# Altium PCB UC-428.pcbdoc
Units mil, origin at the board's own origin, x right, y up, seen from the top; angles counter-clockwise.
Board outline 1574.8 x 1574.8 mil, 4 copper layers (Top Layer, Signal Layer 1, InternalPlane1, Bottom Layer), stack 33.234 mil thick; 63 components, 81 nets, 376 pads, 174 vias.
Unrouted connection lines stored in the file: 52.
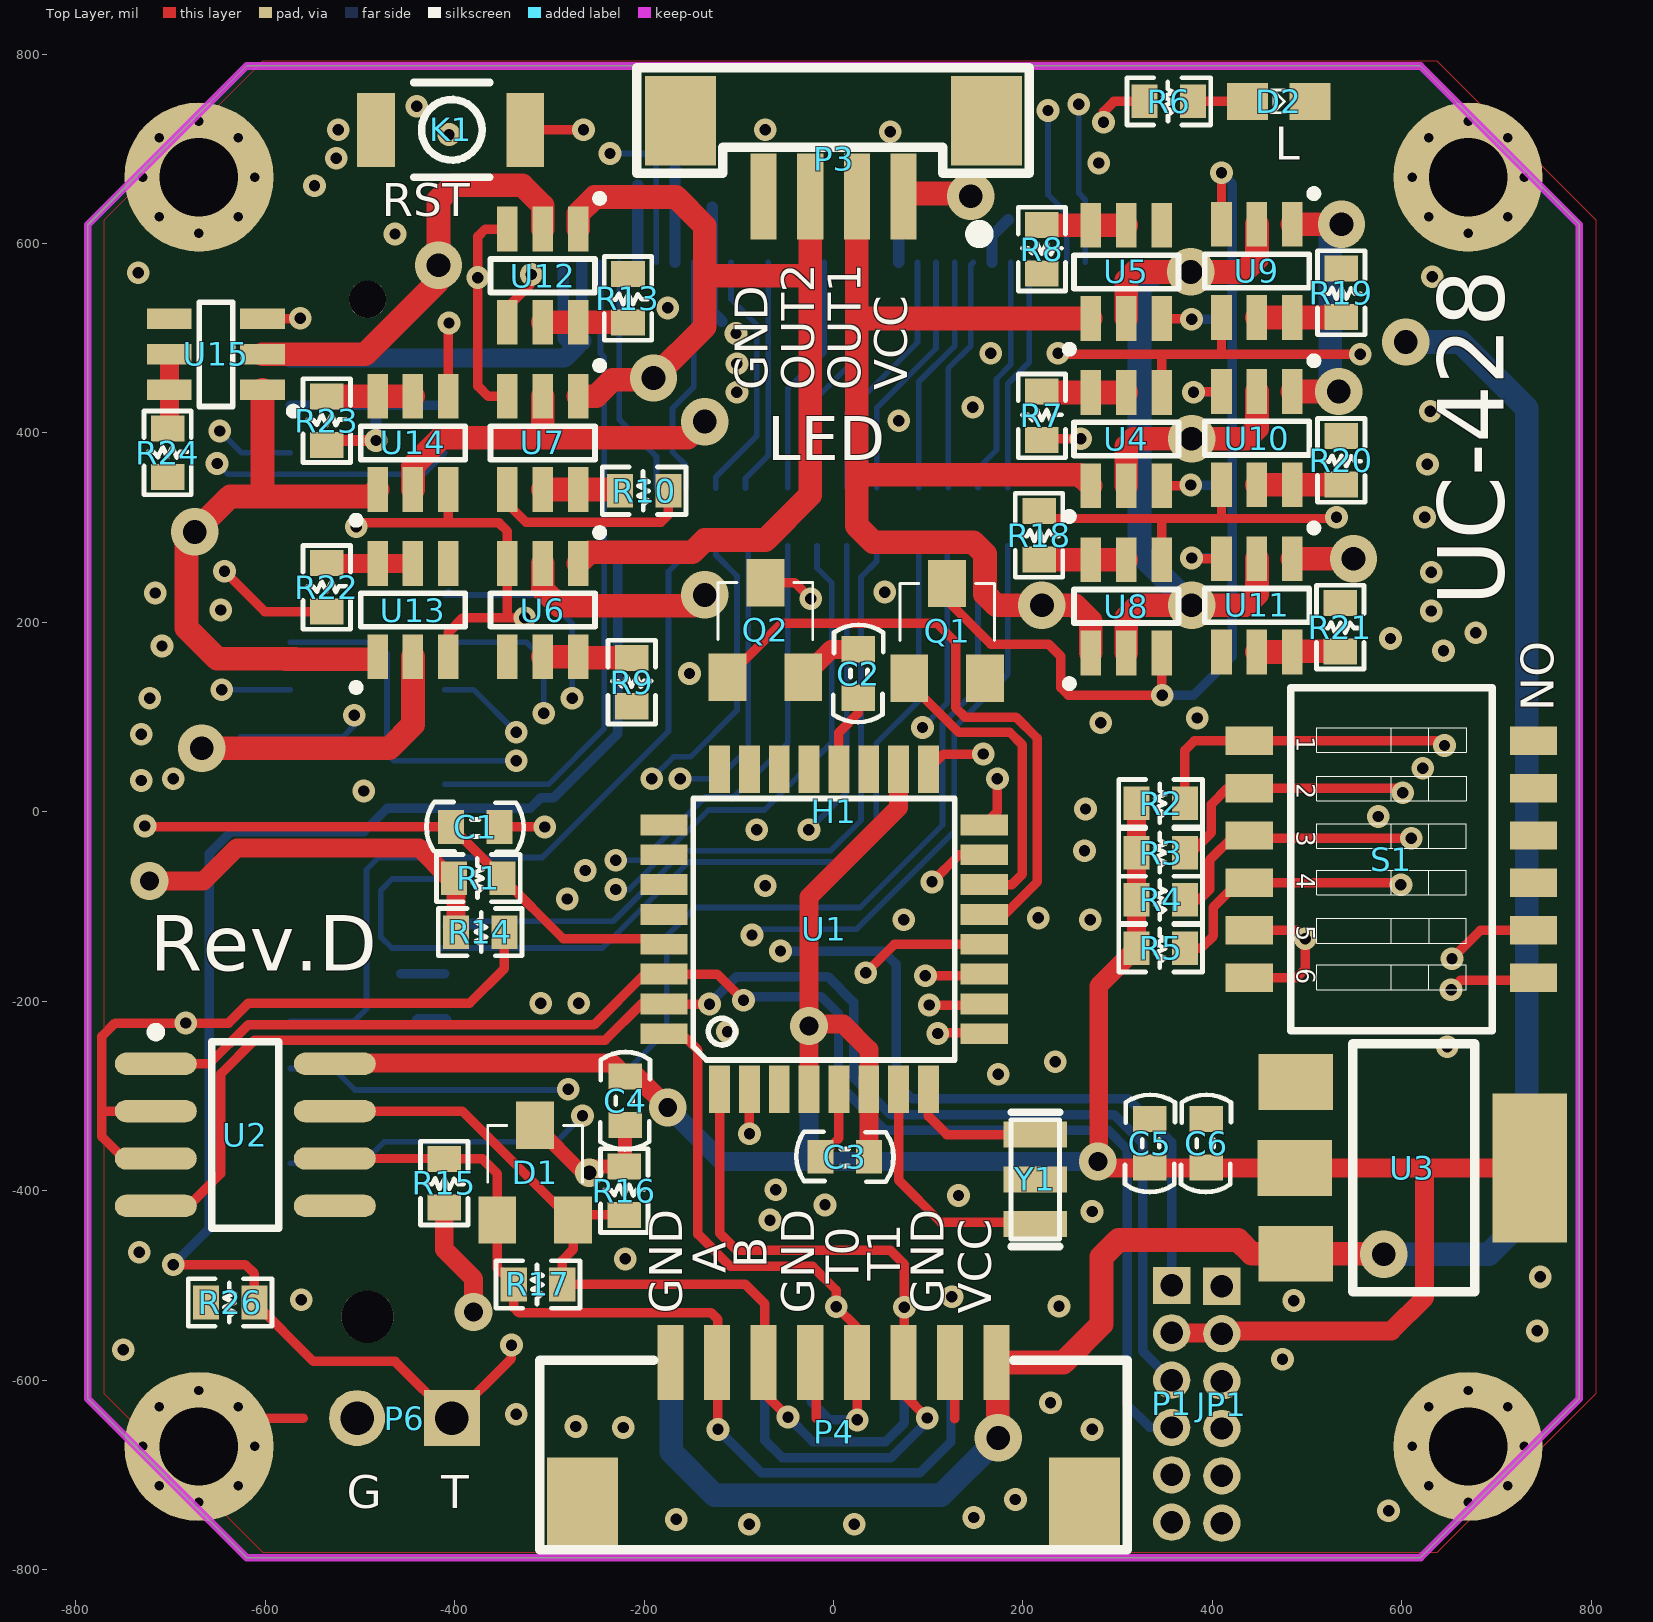
[diagram p0: Top Layer view]
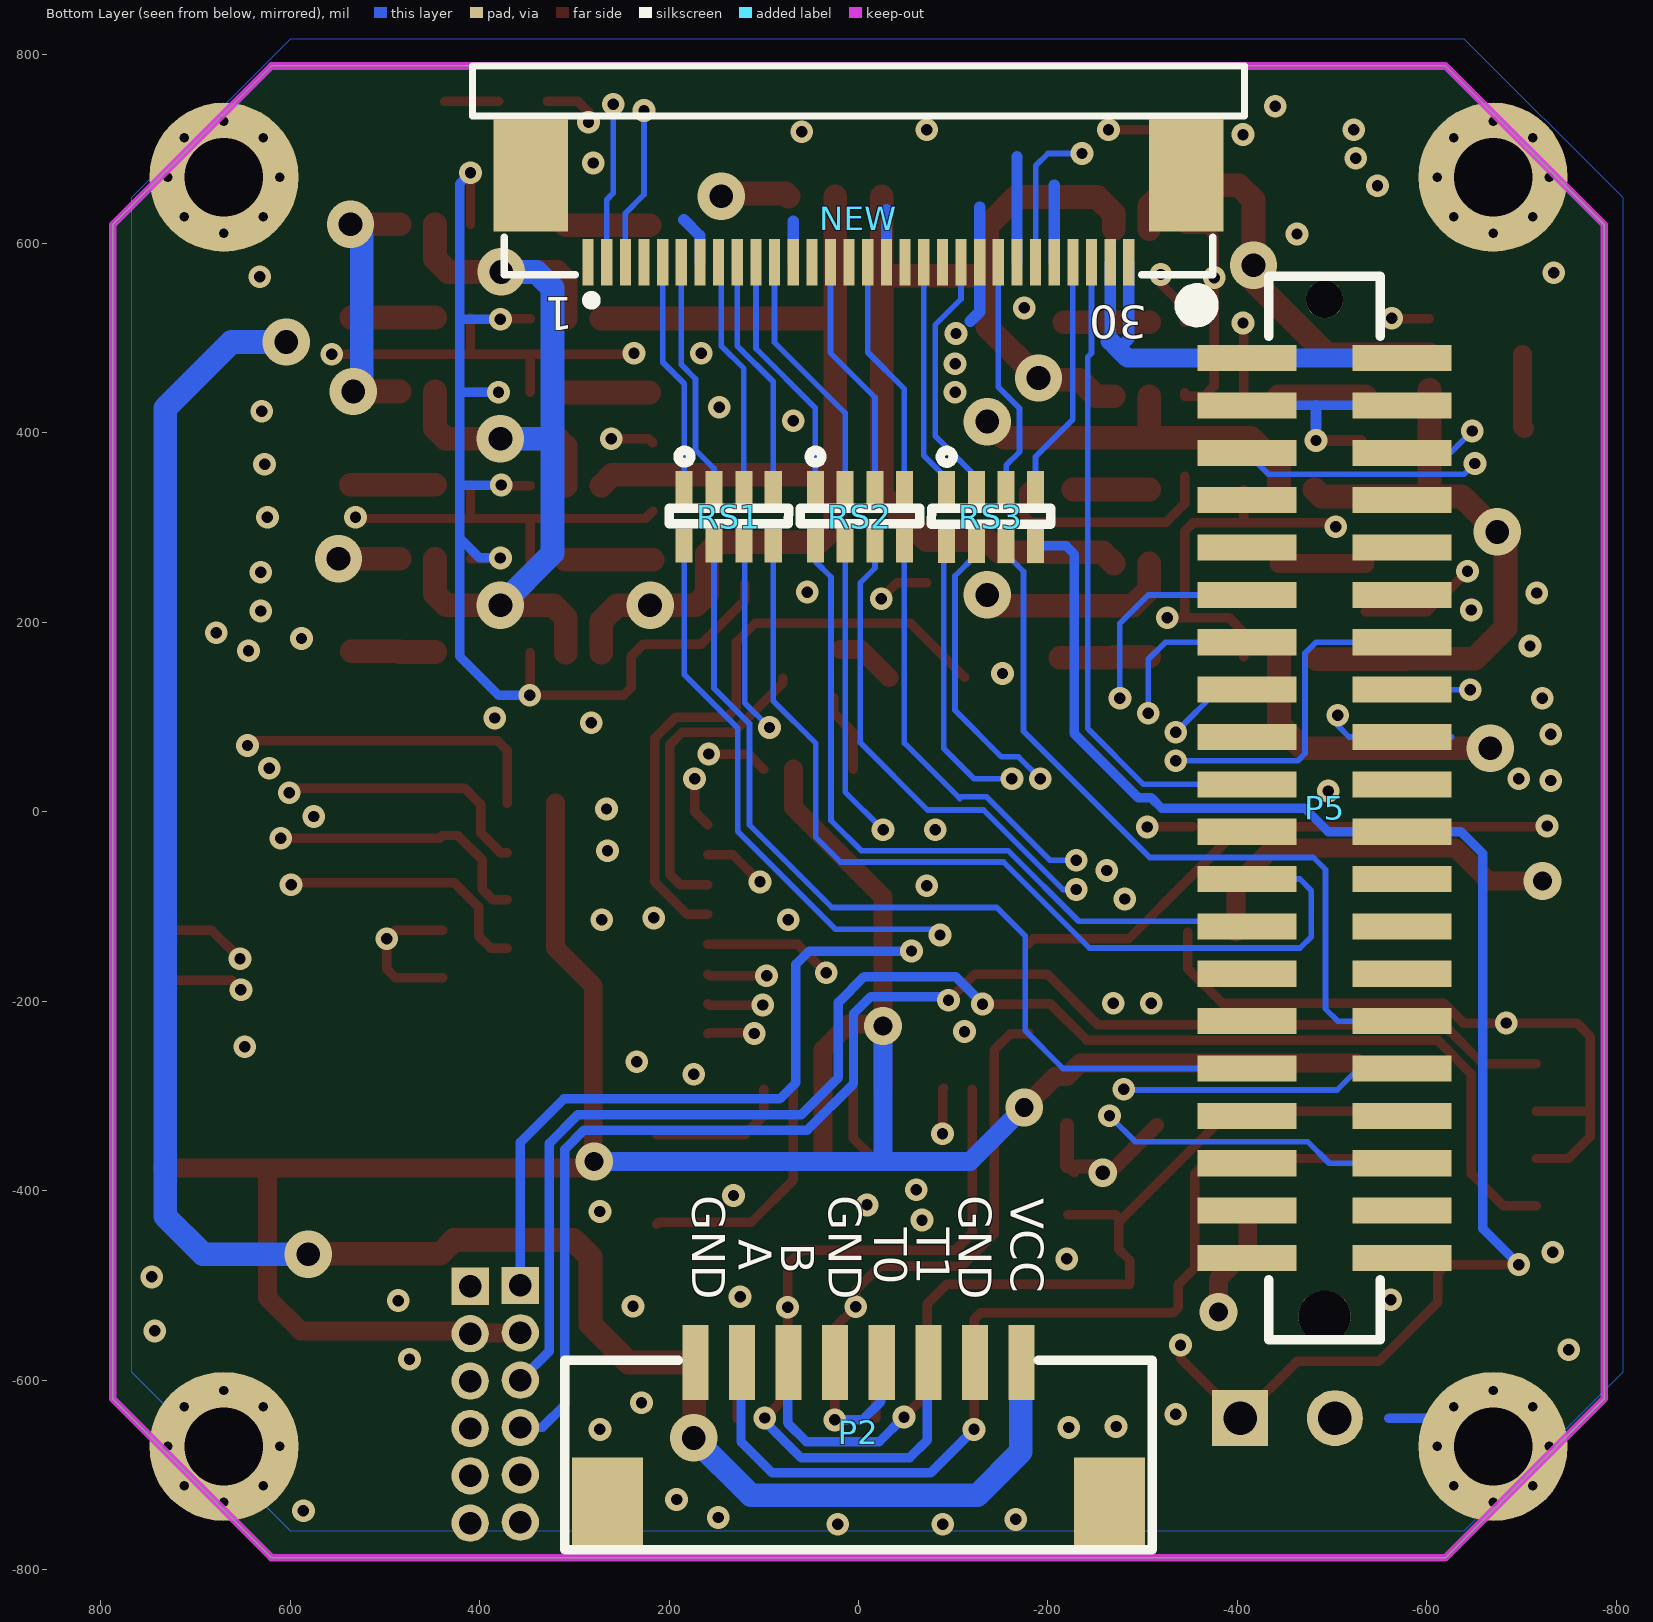
[diagram p1: Bottom Layer view, seen from below]
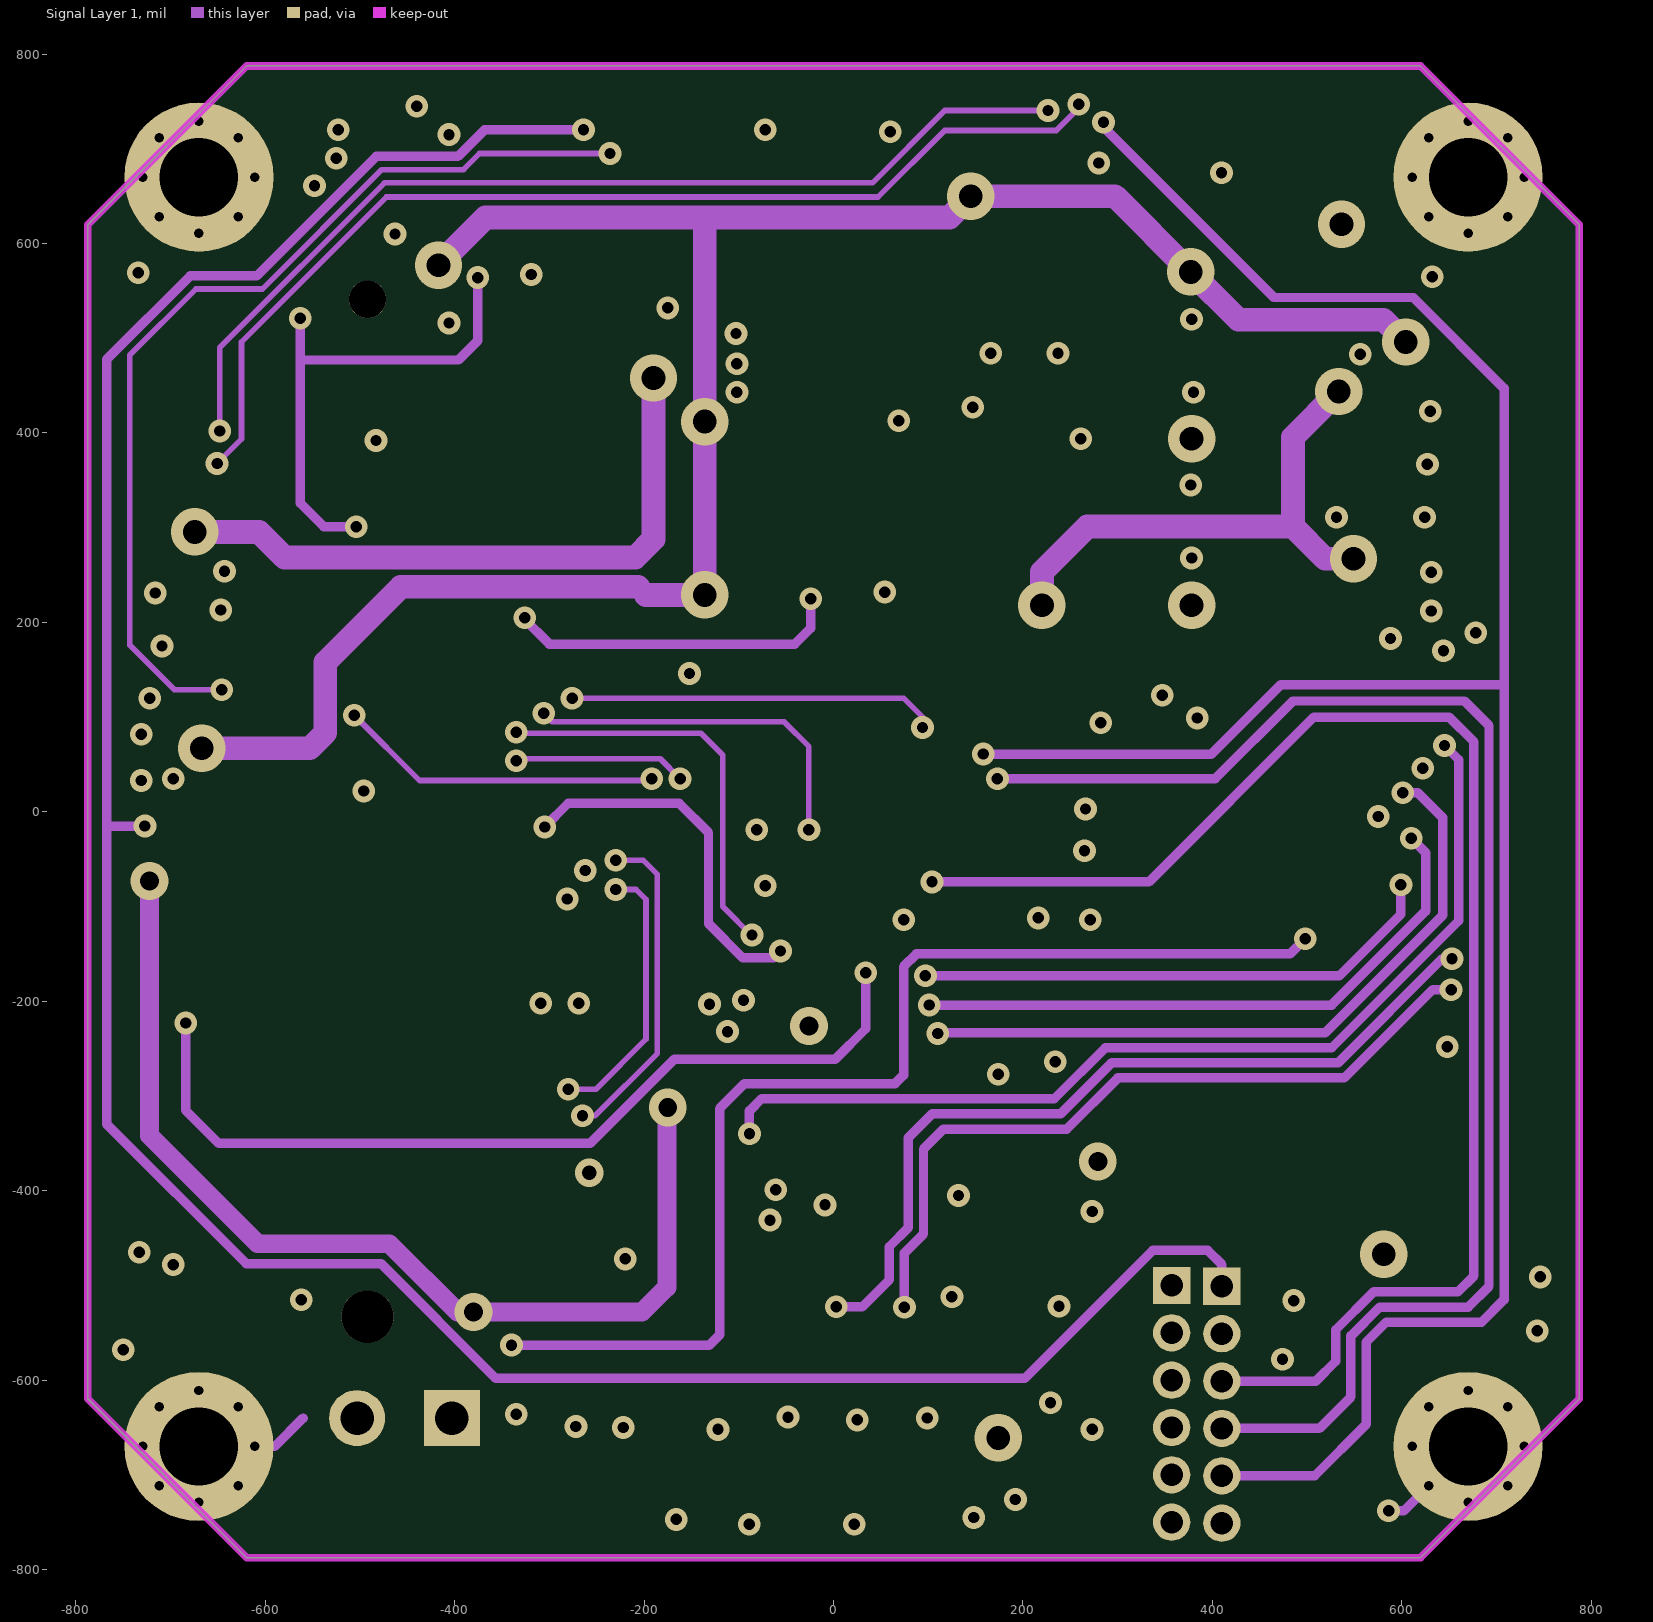
[diagram p2: Signal Layer 1]
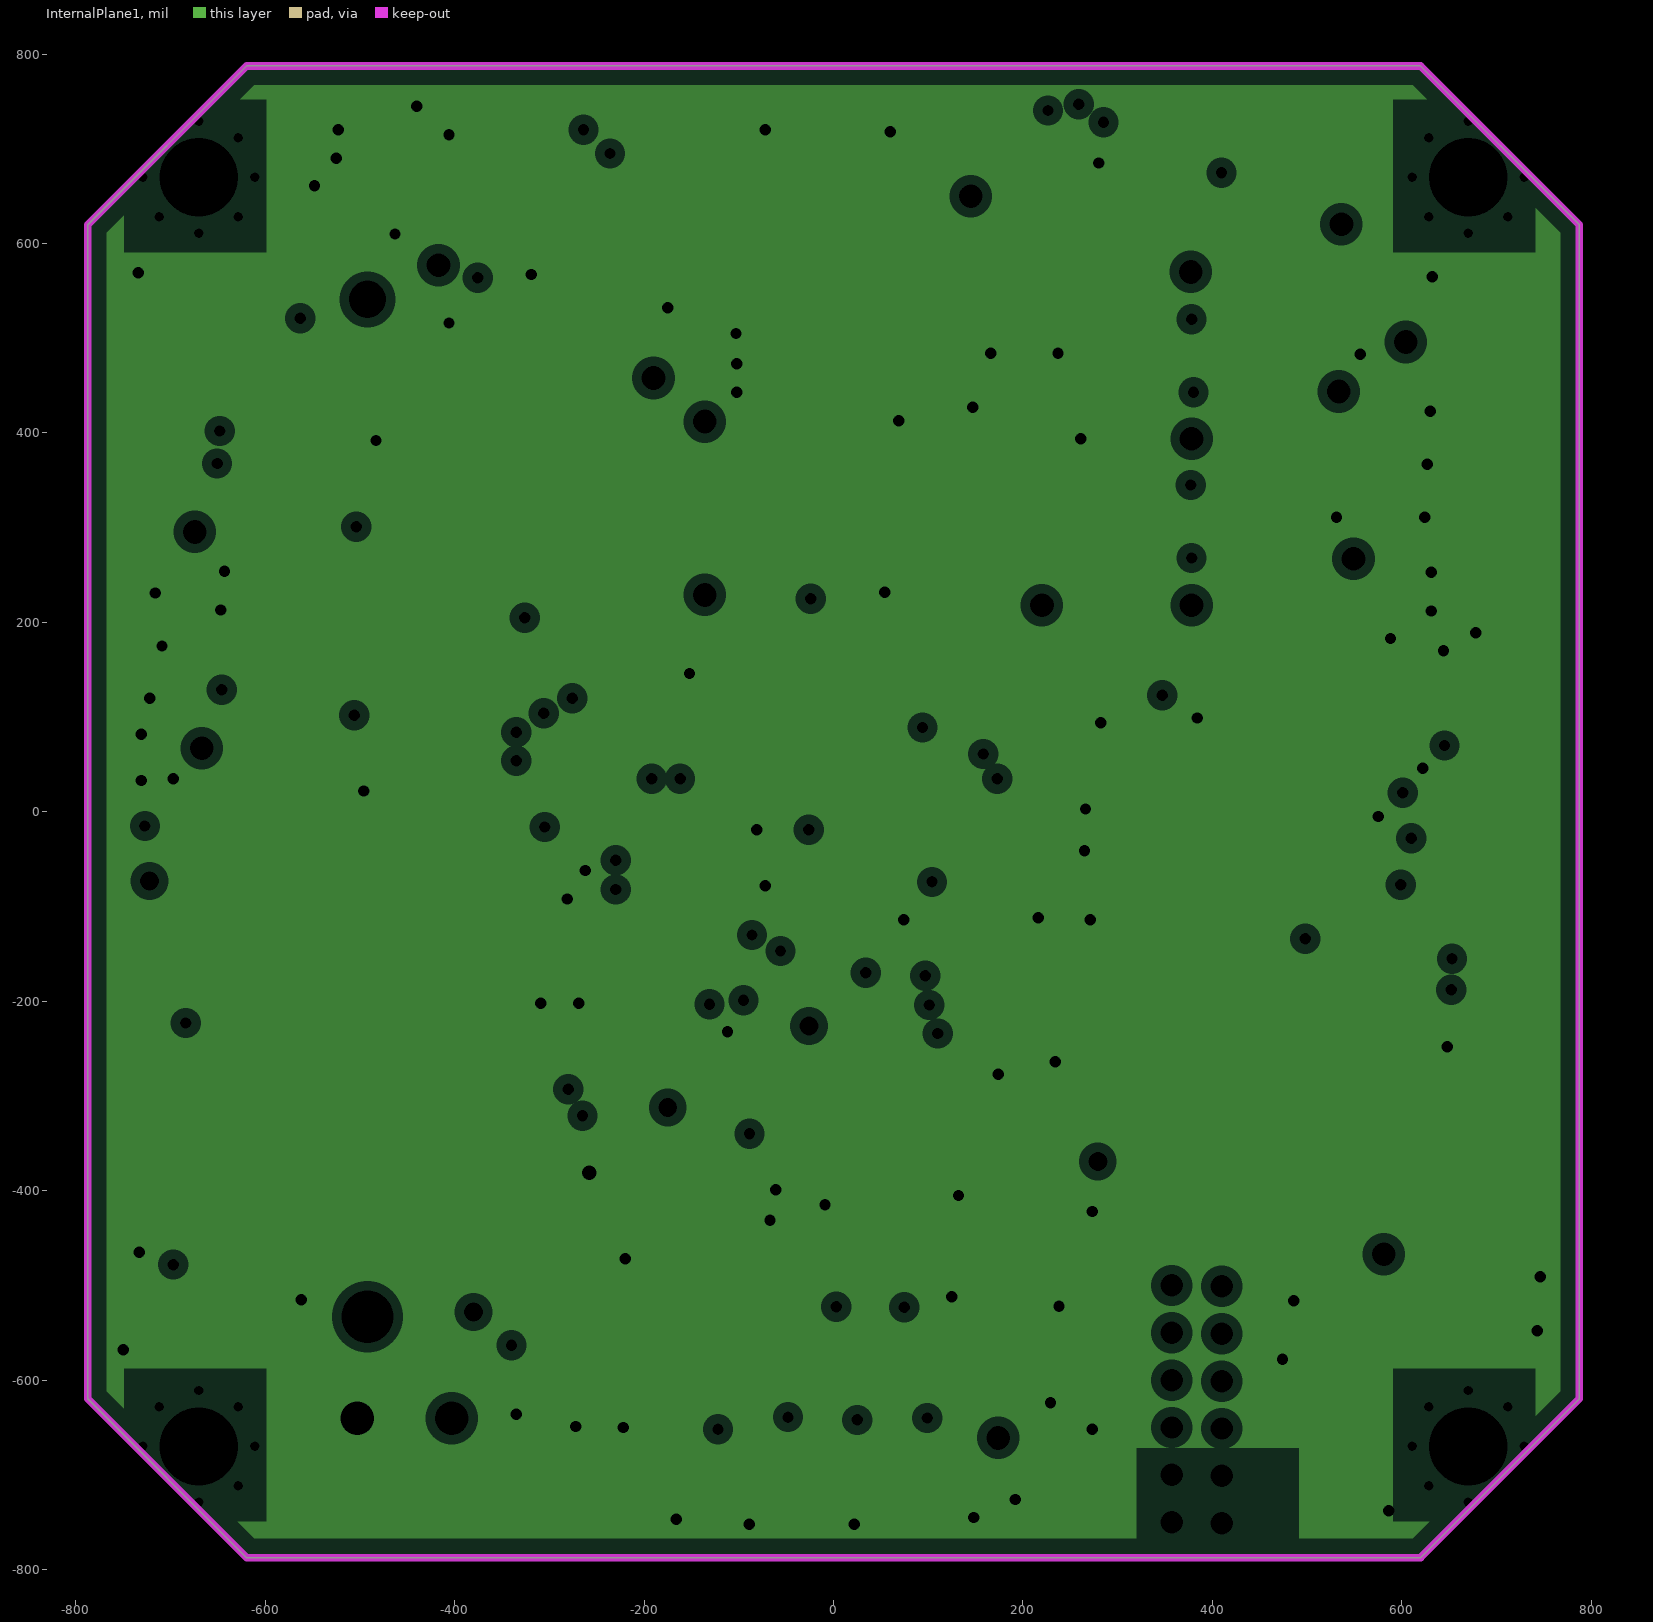
[diagram p3: InternalPlane1, clearances drawn from the general rule]

## Layer stack, top to bottom
Top Layer: signal copper 1.4
Dielectric: core 10, FR-4, Dk 4.2
Signal Layer 1: signal copper 1.417
Dielectric: prepreg 5, Dk 4.2
InternalPlane1: plane copper 1.417, net GND
Dielectric: core 12.6, FR-4, Dk 4.8
Bottom Layer: signal copper 1.4

## Board outline
-787.4,-619.69 -787.4,619.69 -619.68,787.4 619.69,787.4 787.4,619.69 787.4,-619.69 619.69,-787.4 -619.68,-787.4

## Design rules (kind name [scope] priority, off if disabled: settings)
Clearance InPolygon [InPolygon] p1: gap=12
Clearance [All] p2: gap=6
PlaneClearance [All] p1: clearance=10
PlaneConnect PlaneConnect_1 [ISVIA] p1: planeconnectstyle=Direct reliefexpansion=20 reliefentries=4 reliefconductorwidth=10 reliefairgap=10
PlaneConnect [All] p2: planeconnectstyle=Relief reliefexpansion=20 reliefentries=4 reliefconductorwidth=10 reliefairgap=10
PolygonConnect via [IsVia] p1: connectstyle=Direct reliefconductorwidth=10 reliefentries=4 polygonreliefangle="90 Angle"
PolygonConnect [All] p2: connectstyle=Relief reliefconductorwidth=15 reliefentries=4 polygonreliefangle="90 Angle"
RoutingVias [All] p1: holewidth=12 width=24 viastyle="Through Hole" minholewidth=10 minwidth=10 maxholewidth=25 maxwidth=50
SilkscreenOverComponentPads [IsPad] p1: minsilkscreentomaskgap=10
SolderMaskExpansion [All] p1: expansion=4
Width [All] p1: maxlimit=50 minlimit=6 preferedwidth=10
25 further rules are at their usual default settings.

## Classes and differential pairs
component class connect: NEW P5 RS1 RS2 RS3

## Components (designator, comment, footprint, x,y, rotation, side; value= is the part's Value field where it differs from the comment)
C1 "0.1uF" C0603 -378.41,-16 r0 top
C2 "0.1uF" C0603 26,146 r90 top
C3 "0.1uF" C0603 12,-364 r0 top
C4 "0.1u" C0603 -220,-305 r270 top
C5 "1u" C0603 334,-350 r90 top
C6 "0.1u" C0603 393.37,-350 r270 top
D1 "SM712" SOT23-3 -315,-381 r0 top
D2 "GREEN" LED0805 470,750 r180 top
H1 "FixedHole" 固定孔_1 0,0 r0 top locked
JP1 "Header 3X2" MHDR1X6 410,-501 r270 top
K1 "SW-PB" 157SW -483,720 r180 top locked
NEW "30PIN" FH12-30S-0.5SH 0,626 r180 bottom locked (schematic designator HDC1)
P1 "FTDI Basic" MHDR1X6 357,-500 r270 top
P2 "Header 8" SH_1.25MM*8 0,-729 r180 bottom locked
P3 "Header 4" SMT_1.25MM*4 0,690 r0 top locked
P4 "Header 8" SH_1.25MM*8 0,-729 r0 top locked
P5 "Header 20X2" "1.27MM 2*20" -492,4 r90 bottom locked (schematic designator P2)
P6 "Header 2" HDR1X2 -403,-640 r180 top
Q1 "BSS138" "SOT-23 (STANDARD)" 80,141 r0 top
Q2 "BSS138" "SOT-23 (STANDARD)" -112,142 r0 top
R1 "10K" R0603 -375,-70 r180 top
R2 "10K" R0603 345.41,9.1 r180 top
R3 "10K" R0603 345.41,-43 r180 top
R4 "10K" R0603 345.41,-93 r180 top
R5 "10K" R0603 345.41,-144 r180 top
R6 "470" R0603 354,750 r180 top
R7 "5.1" R0603 220,418 r90 top
R8 "5.1" R0603 220,594 r90 top
R9 "5.1" R0603 -213,137 r90 top
R10 "5.1" R0603 -200,339 r180 top
R13 "5.1" R0603 -217,542 r270 top
R14 "10K" R0603 -373,-127 r0 top
R15 "4.7K" R0603 -411,-392 r270 top
R16 "4.7K" R0603 -221,-400 r90 top
R17 "120" R0603 -312,-499 r180 top
R18 "5.1" R0603 217,292 r270 top
R19 "5.1" R0603 536,548 r270 top
R20 "5.1" R0603 536,371 r270 top
R21 "5.1" R0603 535,195 r270 top
R22 "5.1" R0603 -535,237 r90 top
R23 "5.1" R0603 -535,413 r90 top
R24 "5.1" R0603 -703,379 r90 top
R26 "10K" R0603 -637,-518 r180 top
RS1 "22" NC06-4 184.4,342.16 r180 bottom
RS2 "22" NC06-4 45.95,342.16 r180 bottom
RS3 "22" NC06-4 -92.5,342 r180 bottom
S1 "SW DIP-6" DIP_SW_6WAY_SMD 589,-50 r270 top
U1 "ATMEGA328" TQFP32-08 -10,-124 r90 top locked
U2 "MAX485CSA" SOIC-8 -621,-341 r0 top locked
U3 "LM1117-5V" SOT-223 735,-376 r90 top
U4 "AL5802" SOT26 309,393.5 r90 top
U5 "AL5802" SOT26 309,570 r90 top
U6 "AL5802" SOT26 -307,213 r270 top locked
U7 "AL5802" SOT26 -307,389.5 r270 top
U8 "AL5802" SOT26 309,217 r90 top
U9 "AL5802" SOT26 447,571 r270 top
U10 "AL5802" SOT26 447,394.5 r270 top
U11 "AL5802" SOT26 447,218 r270 top
U12 "AL5802" SOT26 -307,566 r270 top
U13 "AL5802" SOT26 -444,213 r90 top
U14 "AL5802" SOT26 -444,389.5 r90 top
U15 "AL5802" SOT26 -652,483 r180 top
Y1 "16MHz" RESONATOR-SMD 213,-388 r270 top

## Footprints (in the part's own frame and the unit in brackets; to place one, negate y for a bottom-side part, rotate by r counter-clockwise, add the part's x,y. Pads: shape width x height; smd on the part's side, far side on the other; paste and mask are expansions set on the pad)
"1.27MM 2*20" [mm]
  round 1.4 hole 1.4: 0(-13.64,0)
  round 1 hole 1: 0(13.64,0)
  rect 0.7x2.65 smd: 1(12.065,2.075) 2(12.065,-2.075) 3(10.795,2.075) 4(10.795,-2.075) 5(9.525,2.075) 6(9.525,-2.075) 7(8.255,2.075) 8(8.255,-2.075) 9(6.985,2.075) 10(6.985,-2.075) 11(5.715,2.075) 12(5.715,-2.075) 13(4.445,2.075) 14(4.445,-2.075) 15(3.175,2.075) 16(3.175,-2.075) 17(1.905,2.075) 18(1.905,-2.075) 19(0.635,2.075) 20(0.635,-2.075) 21(-0.635,2.075) 22(-0.635,-2.075) 23(-1.905,2.075) 24(-1.905,-2.075) 25(-3.175,2.075) 26(-3.175,-2.075) 27(-4.445,2.075) 28(-4.445,-2.075) 29(-5.715,2.075) 30(-5.715,-2.075) 31(-6.985,2.075) 32(-6.985,-2.075) 33(-8.255,2.075) 34(-8.255,-2.075) 35(-9.525,2.075) 36(-9.525,-2.075) 37(-10.795,2.075) 38(-10.795,-2.075) 39(-12.065,2.075) 40(-12.065,-2.075)
  silkscreen extent -14.26,-1.5 14.26,3.7
157SW [mil] "157SW"
  rect 40x78 smd: 1(0,0) 2(-157.5,0)
  silkscreen extent -120,-50 -40,50
C0603 [mm]
  rect 0.7x0.9 smd: 1(0.65,0) 2(-0.65,0)
  silkscreen extent -1.31,-0.67 1.31,0.67
DIP_SW_6WAY_SMD [mm] "DIP Switch; 16 Leads"
  rect 0.76x1.27 smd: 1(-3.175,-3.81) 2(-1.905,-3.81) 3(-0.635,-3.81) 4(0.635,-3.81) 5(1.905,-3.81) 6(3.175,-3.81) 7(3.175,3.81) 8(1.905,3.81) 9(0.635,3.81) 10(-0.635,3.81) 11(-1.905,3.81) 12(-3.175,3.81)
  silkscreen extent -4.6,-2.7 4.6,2.7
FH12-30S-0.5SH [mm] "Connector; FH12 Series; 20 Position; 0.5mm Spaced Bottom Contact"
  rect 0.3x1.25 smd: 1(-7.25,-1.162) 2(-6.75,-1.162) 3(-6.25,-1.162) 4(-5.75,-1.162) 5(-5.25,-1.162) 6(-4.75,-1.162) 7(-4.25,-1.162) 8(-3.75,-1.162) 9(-3.25,-1.162) 10(-2.75,-1.162) 11(-2.25,-1.162) 12(-1.75,-1.162) 13(-1.25,-1.162) 14(-0.75,-1.162) 15(-0.25,-1.162) 16(0.25,-1.162) 17(0.75,-1.162) 18(1.25,-1.162) 19(1.75,-1.162) 20(2.25,-1.162) 21(2.75,-1.162) 22(3.25,-1.162) 23(3.75,-1.162) 24(4.25,-1.162) 25(4.75,-1.162) 26(5.25,-1.162) 27(5.75,-1.162) 28(6.25,-1.162) 29(6.75,-1.162) 30(7.25,-1.162)
  rect 2x3 smd: 31(-8.79,1.163) 31(8.79,1.163)
  silkscreen extent -10.35,-2.31 10.35,4.11
HDR1X2 [mm] "Connector; Header; 2 Position"
  rect 1.5x1.5 hole 0.9: 1(0,0)
  round 1.5 hole 0.9: 2(2.54,0)
LED0805 [mm]
  rect 1.1x1 smd: 1(0.838,0) 2(-0.838,0)
  silkscreen extent -0.18,-0.3 0.2,0.3
MHDR1X6 [mm] "Connector; Header; 6 Position"
  rect 1x1 hole 0.6: 1(0,0)
  round 1 hole 0.6: 2(1.27,0) 3(2.54,0) 4(3.81,0) 5(5.08,0) 6(6.35,0)
NC06-4 [mil]
  rect 18x36 smd: 1(0.4,-0.16) 2(31.9,-0.16) 3(63.39,-0.16) 4(94.4,-0.16) 5(94.4,-61.16) 6(63.39,-61.16) 7(31.9,-61.16) 8(0.4,-61.16)
  silkscreen extent -16,-38 111,40
R0603 [mm]
  rect 0.7x0.9 smd: 1(0.65,0) 2(-0.65,0)
  silkscreen extent -1.12,-0.64 1.12,0.64
RESONATOR-SMD [mm]
  rect 0.7x1.7 smd: 1(-1.2,0) 2(0,0) 3(1.2,0)
  silkscreen extent -1.8,-0.65 1.8,0.65
SH_1.25MM*8 [mm]
  rect 0.7x2 smd: 1(-4.375,3.75) 2(-3.125,3.75) 3(-1.875,3.75) 4(-0.625,3.75) 5(0.625,3.75) 6(1.875,3.75) 7(3.125,3.75) 8(4.375,3.75)
  rect 1.9x2.4 smd: 9(-6.731,0) 9(6.731,0)
  silkscreen extent -7.87,-1.27 7.87,3.81
SMT_1.25MM*4 [mm]
  rect 0.7x2.3 smd: 1(1.875,-1.025) 2(0.625,-1.025) 3(-0.625,-1.025) 4(-1.875,-1.025)
  rect 1.9x2.4 smd: 7(-4.1,1) 7(4.1,1)
  silkscreen extent -5.28,-2.16 5.25,2.42
SOIC-8 [mm]
  oval 2.2x0.6 smd: 1(-2.4,1.905) 2(-2.4,0.635) 3(-2.4,-0.635) 4(-2.4,-1.905) 5(2.4,-1.905) 6(2.4,-0.635) 7(2.4,0.635) 8(2.4,1.905)
  silkscreen extent -2.52,-2.5 0.9,2.88, body extent -2,-2.5 2,2.5, height 1.75
SOT23-3 [mil]
  rect 40x50 smd: 1(40,-50) 2(-40,-50) 3(0,50)
  silkscreen extent -50,-10 50,50, body extent -59,-52 59,46, height 42
SOT26 [mm]
  rect 1.2x0.55 smd: 1(-1.25,0.95) 2(-1.25,0) 3(-1.25,-0.95) 4(1.25,-0.95) 5(1.25,0) 6(1.25,0.95)
  silkscreen extent -2.17,-1.4 0.45,1.62
"SOT-23 (STANDARD)" [mil]
  rect 40x50 smd: D(40,100) G(0,0) S(80,0)
  silkscreen extent -10,40 90,100, body extent -19,-2 99,96, height 42
SOT-223 [mm] "TSOP, 44-Leads, Body 18.4x10.2mm (max), Pitch 0.80mm, IPC Mediu"
  rect 1.5x2 smd: 1(2.3,6.275) 2(0,6.3) 3(-2.3,6.275)
  rect 4x2 smd: 2(0,0)
  silkscreen extent -3.32,1.48 3.32,4.75, body extent -3.2,-0.36 3.3,6.54, height 1.72
TQFP32-08 [mil]
  rect 50x22 smd: 1(-169,110.24) 2(-169,78.74) 3(-169,47.25) 4(-169,15.75) 5(-169,-15.74) 6(-168.99,-47.24) 7(-169,-78.74) 8(-169,-110.24) 17(169.01,-110.23) 18(169,-78.73) 19(169,-47.24) 20(169,-15.74) 21(169,15.75) 22(169,47.25) 23(169,78.74) 24(169,110.24)
  rect 22x50 smd: 9(-110.24,-169) 10(-78.74,-169) 11(-47.24,-168.99) 12(-15.74,-168.99) 13(15.75,-169) 14(47.25,-169) 15(78.74,-169) 16(110.24,-169) 25(110.24,169) 26(78.74,169) 27(47.25,169) 28(15.75,169) 29(-15.75,169) 30(-47.24,169) 31(-78.73,169) 32(-110.23,169)
  silkscreen extent -138,-138 138,138
固定孔_1 [mil]
  round 15 hole 10: 0(-729.05,-670) 0(-729.05,670) 0(-711.73,-711.73) 0(-711.73,-628.27) 0(-711.73,628.27) 0(-711.73,711.73) 0(-670,-729.05) 0(-670,-610.94) 0(-670,610.95) 0(-670,729.06) 0(-628.27,-711.73) 0(-628.27,-628.27) 0(-628.27,628.27) 0(-628.27,711.73) 0(-610.94,-670) 0(-610.94,670) 0(610.95,-670) 0(610.95,670) 0(628.27,-711.73) 0(628.27,-628.27) 0(628.27,628.27) 0(628.27,711.73) 0(670,-729.05) 0(670,-610.94) 0(670,610.95) 0(670,729.06) 0(711.73,-711.73) 0(711.73,-628.27) 0(711.73,628.27) 0(711.73,711.73) 0(729.06,-670) 0(729.06,670)
  round 157.48 hole 82.68: 0(-670,-670) 0(-670,670) 0(670,-670) 0(670,670)

## Part data
C1 C2 C3: library part "CAP SMT C100nF25V10%X7R", "Capacitor"
C4: library part Cap, "Capacitor"
C5: library part Cap, "50V/8.2u/0805"
C6: library part CAP0805, "Capacitor"
D2: library part LED0, "Typical INFRARED GaAs LED"
H1: library part 固定孔
JP1: "Header, 3-Pin, Dual row"
K1: "Switch"
NEW: library part "Header 30", "Header, 30-Pin"
P1: library part ARDUINO_SERIAL_PROGRAMPTH
P2 P4: "Header, 8-Pin"
P3: "Header, 4-Pin"
P5: "Header, 20-Pin, Dual row"
P6: "Header, 2-Pin"
Q1 Q2: library part NMOS
R1 R2 R3 R4 R5 R6 R7 R8 R9 R10 R13 R14 R15 R16 R17 R18 R19 R20 R21 R22 R23 R24 R26: library part Res2, "Resistor"
RS1 RS2 RS3: library part RN4
S1: "DIP Switch, 6 Position, SPST"
U1: library part ATMEGA168
U2: library part MAX3485CSA
U3: library part AMS1117
Y1: library part RESONATORSMD

## Via types
v1: diameter 24, hole 12, Top Layer to Bottom Layer, tented both sides, 151 vias
v2: diameter 50, hole 25, Top Layer to Bottom Layer, tented both sides, 17 vias
v3: diameter 40, hole 20, Top Layer to Bottom Layer, tented both sides, 5 vias
v4: diameter 30, hole 15, Top Layer to Bottom Layer, tented both sides, 1 vias

## Nets (pads, with @x,y where several pads share a name; then routed paths per layer and width w, separated by ;. In a path a pad name is that pad's centre, name@x,y a point inside that pad or via, vN(x,y) a via of type N, cw(c..) or ccw(c..) an arc to the next point about the centre after c; other vN are vias at no path point)
A0: U1.23
A1: U1.24
A2: U1.25
A3: U1.26
A4: U1.27
A5: U1.28
A6: U1.19
A7: U1.22
AD1: R2.2 S1.1 U1.2 | length 1425.2
  Top Layer w10: U1.2@-90,-291.74 U1.2 v1(-88.74,-340) ; R2.2 371,65 381,75 S1.1 v1@640,75
  Signal Layer 1 w10: v1(-88.74,-340) -88.74,-315.74 -76,-303 233,-303 287,-249 526,-249 660,-115 660,55 v1(645,70)
AD2: R3.2 S1.2 U1.9 | length 1067.7
  Top Layer w10: v1@110,-233 157.76,-233 U1.9 ; R3.2 378,-43 399,-22 399,8 416,25 S1.2 596,25 v1(601,20)
  Signal Layer 1 w10: v1@110,-233 519.37,-233 643,-109.37 643,-6 617,20 v1(601,20)
  other v1: 110,-234
AD3: R4.2 S1.3 U1.10 | length 993.2
  Top Layer w10: v1(101,-204) 157.74,-204 U1.10 ; R4.2 386,-93 397,-82 397,-51 423,-25 S1.3 442,-28 v1(610,-28)
  Signal Layer 1 w10: v1(101,-204) 525.75,-204 625,-104.75 625,-43 v1(610,-28)
AD4: R5.2 S1.4 U1.11 | length 897.9
  Top Layer w10: v1(97,-173) 157.23,-173 U1.11 ; R5.2 388,-144 401,-131 401,-100.63 426.63,-75 S1.4 597,-75 v1(599,-77)
  Signal Layer 1 w10: v1(97,-173) 534.12,-173 599,-108.12 v1(599,-77)
AREF: C2.2 U1.20 | length 105.3
  Top Layer w10: U1.20@5.74,66.48 U1.20 5.74,83.74 26,104 C2.2
D2: P2.5 P4.5 S1.8 U1.32 | length 1607.6
  Top Layer w10: U1.32@-179.95,-235.05 -179.95,-233.28 U1.32 -160.52,-234.23 -143.24,-251.51 -143.24,-445.81 -109.04,-480 -22.14,-480 2.94,-505.08 v1(2.94,-522.54) 24.61,-544.21 P4.5@24.61,-558 ; v1(25,-642) P4.5@25,-581.97 ; v1(653,-155) 683,-125 S1.8
  Signal Layer 1 w10: v1(2.94,-522.54) 30.46,-522.54 58.82,-494.18 58.82,-459.15 79,-438.97 79,-344 104,-319 239.63,-319 293.63,-265 532.63,-265 642.63,-155 v1(653,-155)
  Bottom Layer w10: P2.5@-23.61,-581.36 -23.61,-622.39 -4,-642 v1(25,-642)
D3: P2.6 P4.6 S1.7 U1.1 | length 1708
  Top Layer w10: U1.1 -120.24,-444.76 -102,-463 60,-463 74.82,-477.82 v1(74.82,-523) 74.82,-581.36 74.82,-615.82 v1(99,-640) ; v1(652,-187.8) 661.8,-178 736,-178 S1.7
  Signal Layer 1 w10: v1(74.82,-523) 74.82,-465.77 95,-445.59 95,-356 116,-335 246.25,-335 300.25,-281 539.25,-281 632.46,-187.8 v1(652,-187.8)
  Bottom Layer w10: P2.6@-72.82,-581.36 -72.82,-663.18 -54,-682 60.63,-682 99,-643.63 v1(99,-640)
D8: R14.1 U1.12 U2.2 U2.3 | length 1826.5
  Top Layer w10: -772.4,-316 U2.2 U2.2@-748.4,-316 ; U2.3 -749.4,-366 -772.4,-343 -772.4,-237 -758.4,-223 v1(-684,-223) -638.63,-223 -617.63,-202 -384,-202 -347.41,-165.41 R14.1 ; v1(34,-170) 64.26,-139.74 U1.12
  Signal Layer 1 w10: v1(-684,-223) -684,-315 -649,-350 -257,-350 -168,-261 2,-261 34,-229 v1(34,-170)
D9: Q2.G U1.13 | length 663.3
  Top Layer w10: Q2.G -55,199 109,199 129,179 129,109.63 138.63,100 192.63,100 215,77.63 215,-74 180.75,-108.25 U1.13
D10: Q1.G U1.14 | length 332.4
  Top Layer w10: Q1.G 80,136 132,84 186,84 199,71 199,-66 188.25,-76.75 U1.14
DTR: C1.1 P1.1 | length 1167.5
  Top Layer w10: C1.1@-340,-16 C1.1 v1(-305,-16)
  Signal Layer 1 w10: v1(-305,-16) -280,9 -163,9 -132,-22 -132,-118 -96,-154 -63,-154 v1(-56,-147)
  Bottom Layer w10: v1(-56,-147) 52,-147 66,-161 66,-286 83,-303 311,-303 357,-349 P1.1
FX3_SPI-MISO_UART-TX: P5.37
FX3_SPI-MOSI_UART-RX: P5.35
GND: C2.1 C3.2 C4.1 C5.1 C6.2 D1.3 D2.2 H1.0 JP1.6 K1.1 NEW.1 NEW.7 NEW.12 NEW.17 NEW.22 NEW.24 NEW.26 P1.5 P1.6 P2.1 P2.4 P2.7 P3.4 P4.1 P4.4 P4.7 P5.3 P5.4 P5.27 P5.29 P6.2 Q1.S Q2.S R7.2 R8.2 R9.2 R10.2 R13.2 R16.1 R18.2 R19.2 R20.2 R21.2 R22.2 R23.2 R24.2 R26.1 S1.9 S1.10 S1.11 S1.12 U1.3 U1.5 U1.21 U2.5 U3.1 U4.4 U5.4 U6.4 U7.4 U8.4 U9.4 U10.4 U11.4 U12.4 U13.4 U14.4 U15.4 Y1.2 | length 3065.6
  Top Layer w6: R23.2 R23.2@-530.41,387.41
  Top Layer w10: H1.0@-670,-670 -640,-640 -560,-640 ; v1(-643,254) -600.41,211.41 R22.2 ; U14.4 -406.6,515.4 v1(-406,516) ; U7.4@-344.4,354.31 U7.4 -344.4,325.4 -324.67,305.67 -211,305.67 -182.15,305.67 -174.41,313.41 R10.2 ; U12.4 -344.4,532.6 v1@-320,557 ; R16.1@-227.59,-381 R16.1 R16.1@-220,-373.41 ; R10.2@-179,343.59 R10.2 ; R10.2@-178.54,339 R10.2 ; P4.4@-25,-579.97 -23.61,-581.36 -18,-586.97 -18,-640 ; C3.2 5.74,-344.67 U1.5 ; P4.7@124.03,-581.36 128,-585.33 128,-641 ; R18.2 224.92,309.67 409.6,309.67 ; R7.2@217,389.41 R7.2 ; R7.2@221.59,394 v1(261,394) ; v1(237,484) 238,483 348,483 ; U8.4@346.4,250.4 U8.4 346.4,309.67 ; U4.4 346.4,481.4 348,483 ; U10.4 409.6,309.67 ; 409.6,484.6 U9.4 ; v1(531,311) 529.67,309.67 409.6,309.67 ; v1(556,483) 348,483
  Top Layer w12: R23.2@-530.41,392 v1(-483,392)
  Top Layer w15: D1.3 -265,-381 v4(-258,-381) -251.41,-374.41 R16.1 ; R16.1@-220,-373.41 C4.1
  Top Layer w20: Q2.S -2.41,171.59 C2.1@19,171.59
  Signal Layer 1 w10: H1.0@-670,-670 -610.94,-670 -590,-670 -560,-640 ; v1(586,-738) 602,-738 H1.0@628.27,-711.73
  Bottom Layer w10: H1.0@-670,-670 -640,-640 -560,-640 ; P5.4 -483,429 P5.3 ; P5.27@-457,-171 P5.27 ; H1.0@670,670 H1.0@711.73,628.27
  Bottom Layer w12: v1(-483,392) -483,429 ; NEW.26 -206.69,661.69 ; NEW.24 -167.32,691.68 ; -127.95,638.51 NEW.22 -127.95,527.95 -118,518 ; NEW.17 -29.53,635.53 ; NEW.12 68.9,623.6 ; NEW.7 167.32,608.03 184.29,625
  Bottom Layer w15: P5.29@-438,-221 P5.29
  other v1: -89,-752 22,-752 -166,-747 148,-745 192,-726 273,-652 -222,-650 -272,-649 -335,-636 229,-624 474,-578 -750,-568 743,-548 238,-522 486,-516 -562,-515 125,-512 746,-491 -220,-472 -733,-465 -67,-431 273,-422 -9,-415 132,-405 -61,-399 174,-277 234,-264 648,-248 -112,-232 -309,-202 -269,-202 74,-114 271,-114 216,-112 -281,-92 -72,-78 -262,-62 265,-41 -81,-19 575,-5 266,3 -496,22 -731,33 -697,35 622,46 -731,82 282,94 384,99 -722,120 -152,146 644,170 -709,175 588,183 678,189 631,212 -647,213 -716,231 54,232 631,253 624,311 627,367 69,413 630,423 147,427 -102,443 -102,473 166,484 -103,505 -175,532 632,565 -319,567.24 -734,569 -463,610 -548,661 280,685 -525,690 -406,715 60,718 -523,720 -72,720 -440,745
MISO: JP1.4 U1.16 | length 1592.1
  Top Layer w10: U1.16 173,0.24 v1(173,35)
  Signal Layer 1 w10: v1(173,35) 403,35 485,117 666,117 692,91 692,-501 670.09,-522.91 576.73,-522.91 546.26,-553.37 546.26,-617.74 513,-651 JP1.4
MOSI: JP1.3 U1.15 | length 1617.2
  Top Layer w10: v1(104,-74) 132.74,-45.26 U1.15
  Signal Layer 1 w10: v1(104,-74) 333,-74 507,100 649.94,100 676,73.94 676,-490 659.09,-506.91 570.09,-506.91 530.26,-546.74 530.26,-580 509.26,-601 JP1.3
NetD2_1: D2.1 R6.2 | length 57.4
  Top Layer w10: R6.2 D2.1
NetQ1_D: Q1.D U4.3 U5.3 U8.3 U9.3 U10.3 U11.3 | length 1295.2
  Top Layer w10: Q1.D 120,223 154,189 158,185 166,177 227,177 240,164 240,131 248,123 v1(347,123) ; v1@346.4,123.6 U8.3 ; U4.3 v1@369.71,344.29 ; U5.3 v1@369.21,520.79 ; v1@378.79,267.21 U11.3 ; v1@380.71,443.71 U10.3 ; U9.3 v1(409.6,674.6)
  Bottom Layer w10: v1(347,123) 380,123 421,164 421,289 ; v1(377,345) 421,345 ; v1(378,268) 400,268 421,289 ; v1(378,520) 420,520 ; v1(380,443) 421,443 ; v1(409.6,674.6) 421,663.2 421,443 ; 421,289 421,345 ; 421,345 421,443
NetQ2_D: Q2.D U6.3 U7.3 U12.3 U13.3 U14.3 U15.3 | length 1626.6
  Top Layer w10: U15.3 v1@-563.6,520.4 ; v1@-500,305 -353,305 -344.4,296.4 U6.3 ; U13.3 -406.6,189.4 -391,205 -345,205 ; -406.6,305.6 U14.3 ; U6.3@-344.4,285.8 U6.3 ; U7.3@-344.4,442.4 U7.3 -364.71,438.71 -375.5,449.5 v1(-375.5,564) -375.5,607.43 -367.72,615.21 U12.3 ; v1(-326,205) -345,205 ; Q2.D -41,242 v1(-24,225) ; -345,205 -344.4,205.6 U6.3
  Signal Layer 1 w10: v1(-563,521) -563,477 ; v1(-504,301) -538,301 -563,326 -563,477 ; v1(-375.5,564) -375.5,497.5 -396,477 -563,477 ; v1@-327,204 -300,177 -41,177 -24,194 v1(-24,225)
NetR7_1: R7.1 U4.5 U4.6 | length 88.1
  Top Layer w25: R7.1@220.88,442.71 U4.6 U4.5
NetR8_1: R8.1 U5.5 U5.6 | length 88.6
  Top Layer w25: R8.1@220.38,619.21 U5.6 U5.5
NetR9_1: R9.1 U6.5 U6.6 | length 92.8
  Top Layer w25: U6.5 U6.6 ; U6.6@-268.4,162.59 R9.1
NetR10_1: R10.1 U7.5 U7.6 | length 80.1
  Top Layer w25: U7.5 U7.6 R10.1@-226.88,340.29
NetR13_1: R13.1 U12.5 U12.6 | length 89.6
  Top Layer w25: U12.5 U12.6 R13.1@-217.38,516.79
NetR18_1: R18.1 U8.5 U8.6 | length 91.8
  Top Layer w25: R18.1@217.2,266.21 U8.6 U8.5
NetR19_1: R19.1 U9.5 U9.6 | length 88.4
  Top Layer w25: U9.5 U9.6 R19.1@535.38,521.79
NetR20_1: R20.1 U10.5 U10.6 | length 88.9
  Top Layer w25: U10.5 U10.6 R20.1@535.88,345.29
NetR21_1: R21.1 U11.5 U11.6 | length 88.3
  Top Layer w25: U11.5 U11.6 485.02,169.41 R21.1
NetR22_1: R22.1 U13.5 U13.6 | length 90.6
  Top Layer w20: R22.1@-534.62,262.21 U13.6 U13.5
NetR23_1: R23.1 U14.5 U14.6 | length 90.9
  Top Layer w25: R23.1@-534.88,438.71 U14.6 U14.5
NetR24_1: R24.1 U15.5 U15.6 | length 79.2
  Top Layer w20: R24.1 -701.21,406.38 U15.6 U15.5
OSC_IN: U1.7 Y1.3 | length 259.3
  Top Layer w10: U1.7 68.74,-388.74 113.25,-433.25 211,-433.25 Y1.3
OSC_OUT: U1.8 Y1.1 | length 151.9
  Top Layer w10: U1.8 100.24,-321.24 119.76,-340.76 Y1.1 ; Y1.1@189,-340.76 Y1.1@191,-338.76
OUT1: P3.2 U4.1 U5.1 U8.1 U9.1 U10.1 U11.1 | length 2150.6
  Top Layer w25: 24.61,407.39 24.61,458 ; P3.2 24.61,458 ; 25.82,520.79 U5.1 ; 28,356 259.89,356 U4.1 ; U8.1 271.6,201.4 255,218 v2(220,218) 171.84,218 160,229.84 160,272.16 147.66,284.5 42.05,284.5 24.61,301.94 24.61,359.39 24.61,458 ; U11.1 v2(549,267.21) ; U10.1 v2(533.29,443.71) ; U9.1 v2(536.21,620.21)
  Signal Layer 1 w25: v2(220,218) 220,253.21 268,301.21 485,301.21 ; v2(533.29,443.71) 485,395.43 485,301.21 ; v2(549,267.21) 519,267.21 485,301.21
  Bottom Layer w25: v2(533.29,443.71) 524.5,452.5 524.5,608.5 v2(536.21,620.21)
OUT2: P3.3 U6.1 U7.1 U12.1 U13.1 U14.1 U15.1 | length 2452.2
  Top Layer w25: v2@-683,287 -683,194 -650.5,161.5 -568.2,161.5 ; v2(-674.5,295.5) -637.05,332.95 -488.74,332.95 U14.1 ; -602.79,334.16 U15.1 ; -579,161 -483.93,161 U13.1@-484.06,161.13 ; U6.1 -257.81,274 -149,274 -136,287 -72,287 -24.61,334.39 -24.61,566 ; U7.1 -250.67,438.71 -233.19,456.19 -191.81,456.19 v2(-190,458) -136,512 -136,618.5 -166.5,649 -252,649 -269.6,631.4 U12.1 ; -133,566 -24.61,566 ; P3.3 -24.61,566
  Signal Layer 1 w25: v2(-674.5,295.5) -606.5,295.5 -579.5,268.5 -209.34,268.5 -190,287.84 v2(-190,458)
RESET: C1.2 JP1.1 K1.2 R1.2 U1.29 | length 3485.9
  Top Layer w10: v1@-727,-16 C1.2 -403.41,-16 R1.2 -285.41,-134 -184.75,-134 U1.29 ; K1.2 v1(-264,720)
  Signal Layer 1 w10: v1(-727,-15) -767.4,-15 ; v1(-264,720) -368.47,720 -396.47,692 -482.8,692 -608.8,566 -679,566 -767.4,477.6 -767.4,-15 ; JP1.1 410,-478 395,-463 337,-463 202,-598 -356.7,-598 -477.7,-477 -620,-477 -767.4,-329.6 -767.4,-15
RX/B: D1.1 P2.3 P4.3 R16.2 R17.2 U2.7 | length 987.8
  Top Layer w10: U2.7 -391.97,-316 D1.1@-276.97,-431 ; R16.2 -271.56,-425.59 D1.1@-276.97,-431 ; v1(-48,-639) -72.82,-614.18 -72.82,-581.36 -72.82,-519.18 -93,-499 R17.2 -286.41,-473.41 -275,-462 D1.1 D1.1@-276.97,-431
  Bottom Layer w10: v1(-48,-639) -22,-665 55,-665 74.82,-645.18 P2.3@74.82,-581.36
RXI: P1.4 U1.30 U2.1 | length 1509.2
  Top Layer w10: U2.1 -659,-266 -618,-225 -253,-225 -199.24,-171.24 U1.30 -122.76,-171.24 v1(-95,-199)
  Bottom Layer w10: v1@-91,-195 -12.91,-195 5.25,-213.16 5.25,-287.25 54,-336 289.84,-336 310,-356.16 310,-626 334,-650 P1.4
SCK: JP1.5 R6.1 U1.17 | length 2658.5
  Top Layer w10: U1.17 116.23,61 v1(158,61) ; v1@285,739 296,750 R6.1
  Signal Layer 1 w10: v1(158,61) 399,61 472,134 707,134 ; v1(285,728) 285,723 465,543 612,543 708,447 708,-469 708,-515 684.09,-538.91 583.35,-538.91 562.26,-560 ; JP1.5 508,-701 562.26,-646.74 562.26,-560 ; 562.26,-596.74 562.26,-560
TX/A: D1.2 P2.2 P4.2 R15.2 R17.1 U2.6 | length 1026
  Top Layer w10: U2.6 -411.41,-366 R15.2 -370.59,-366.41 -355,-382 D1.2 -355,-481.59 R17.1 -337.59,-523.41 -332,-529 -129,-529 -122.03,-535.97 -122.03,-581.36 v1(-122.03,-652)
  Bottom Layer w10: v1(-122.03,-652) -76.03,-698 91,-698 124.03,-664.97 P2.2@124.03,-581.36
TXO: P1.3 U1.31 U2.4 | length 1586.5
  Top Layer w10: U2.4 -681,-416 -647,-382 -647,-276.63 -611.37,-241 -241,-241 -202.73,-202.73 U1.31 -178.74,-203 v1(-131,-203)
  Bottom Layer w10: v1(-131,-203) -131,-202.47 -102.53,-174 -6,-174 21.25,-201.25 21.25,-280.62 60.63,-320 296.47,-320 326.31,-349.85 326.31,-569.31 P1.3
UD4: P5.13 RS2.7 | length 867.9
  Signal Layer 1 w6: v1(-306,104) -297,95 -52,95 -26,69 v1(-26,-19)
  Bottom Layer w6: P5.13 -324,179 -306,161 v1(-306,104) ; v1(-26,-19) 14.06,21.06 RS2.7
UD4_IO: NEW.11 RS2.2 | length 269.1
  Bottom Layer w6: RS2.2 14.06,421.06 88.58,495.58 NEW.11
UD5: P5.32 RS2.6 | length 1097.8
  Signal Layer 1 w6: v1(-280,-293) -251,-293 -198,-240 -198,-92.61 -208.61,-82 v1(-230,-82)
  Bottom Layer w6: P5.32 -528,-271 -505.22,-293.78 -280.78,-293.78 v1(-280,-293) ; v1(-230,-82) -215.97,-82 -131.97,2 -73,2 -2,73 -2,242 -17.44,257.44 RS2.6
UD5_IO: NEW.14 RS2.3 | length 257.7
  Bottom Layer w6: RS2.3 -17.44,437.56 29.53,484.53 NEW.14
UD6: P5.36 RS2.5 | length 1119
  Signal Layer 1 w6: v1(-265,-321) -252,-321 -186,-255 -186,-66 -201,-51 v1(-230,-51)
  Bottom Layer w6: P5.36 -497,-371 -474.22,-348.22 -292.22,-348.22 v1(-265,-321) ; v1(-230,-51) -201.94,-51 -134.94,16 -105,16 ; -107,14 -105,16 ; RS2.5 -48.45,72.55 -105,16
UD6_IO: NEW.16 RS2.4 | length 254.2
  Bottom Layer w6: RS2.4 -48.45,446.55 -9.84,485.16 NEW.16
UD7: P5.14 RS3.8 | length 866.2
  Signal Layer 1 w6: v1@-333,56 -183,56 v1(-162,35)
  Bottom Layer w6: P5.14@-540,179 P5.14 -483,179 -471.47,167.47 -471.47,61.49 -463.98,54 v1(-335,54) ; v1(-162,35) -122,35 -90,67 -90,277.94 RS3.8
UD7_IO: NEW.19 RS3.1 | length 248.3
  Bottom Layer w6: RS3.1 -92.9,352.1 -68.9,376.1 NEW.19
UD8: P5.15 RS1.8 | length 1120.7
  Signal Layer 1 w6: v1@-334,83 -140,83 -117,60 -117,-100 v1@-86,-131
  Bottom Layer w6: P5.15 -380,129 v1(-335,84) ; v1@-86,-131 -79,-124 -61,-124 ; -73,-124 -61,-124 ; RS1.8 184,145.06 127.47,88.53 127.47,-20.83 24.3,-124 -61,-124
  other v1: -86,-130
UD8_IO: NEW.5 RS1.1 | length 247.6
  Bottom Layer w6: RS1.1 184,452 206.69,474.69 NEW.5
UD9: P5.31 RS1.7 | length 1000.9
  Bottom Layer w6: P5.31 -216,-271 -176,-231 -176,-131 -146,-101 28,-101 115,-14 115,93.03 152.5,130.53 RS1.7
UD9_IO: NEW.6 RS1.2 | length 252.5
  Bottom Layer w6: RS1.2 152.5,362.5 172,382 172,456.97 187.01,471.98 NEW.6
UD10: P5.11 RS1.6 | length 897.2
  Signal Layer 1 w6: v1(-276,120) 74,120 94,100 v1(94,89)
  Bottom Layer w6: P5.11@-406.31,233 P5.11 ; -337,229 P5.11 ; v1(-276,120) -276,199 -306,229 P5.11 ; v1(94,89) 120,115 120,279.99 RS1.6
UD10_IO: NEW.8 RS1.3 | length 249.3
  Bottom Layer w6: RS1.3 121.01,468.01 145,492 145,577.59 NEW.8
UD11: P5.18 RS3.7 | length 782.2
  Signal Layer 1 w6: v1(-506,102) -437,33 -194,33 v1(-192,35)
  Bottom Layer w6: -626,79 P5.18 -518,79 -506,91 v1(-506,102) ; v1(-192,35) -169,58 -151.17,58 -102,107.17 -102,249 -124.39,271.39 RS3.7
UD11_IO: NEW.21 RS3.2 | length 267.7
  Bottom Layer w6: RS3.2 -124.39,353.61 -80.9,397.1 -80.9,513.9 -108.27,541.27 NEW.21
UFLASH_IO: NEW.4
UHREF: P5.23 RS1.5 | length 1024.5
  Bottom Layer w6: P5.23 -466,-71 -478,-83 -478,-131.98 -466.2,-143.78 -243.81,-143.78 -153.03,-53 -97,-53 19,-53 45,-27 45,72 90,117 RS1.5
UHREF_IO: NEW.9 RS1.4 | length 254
  Bottom Layer w6: RS1.4 90,453.97 127.95,491.92 NEW.9
UPCLK: P5.30 RS3.6 | length 812.2
  Bottom Layer w6: P5.30 -506,-221 -493,-208 -493,-61 -480.22,-48.22 -465,-48.22 ; -470.22,-48.22 -465,-48.22 ; RS3.6@-155.89,272.12 -174.17,253.84 -174.17,85.13 -307.52,-48.22 -465,-48.22
UPCLK_IO: NEW.23 RS3.3 | length 253.5
  Bottom Layer w6: RS3.3 -155.89,365.89 -170,380 -170,426.08 -147.64,448.45 NEW.23
URESET: NEW.25 P5.16 | length 1246.3
  Signal Layer 1 w6: v1(-646,129) -696,129 -743,176 -743,482.2 -673.2,552 -603,552 -477,678 -390.67,678 -373.67,695 v1(-236,695)
  Bottom Layer w6: v1(-646,129) P5.16 ; v1(-236,695) -200,695 -187.01,682.01 NEW.25
USCK: NEW.2 P5.5 | length 1553.3
  Signal Layer 1 w6: v1(-650.8,367.8) -625,393.61 -625,496.06 -472.06,649 47,649 117.38,719.38 235.08,719.38 259,743.3 v1(259,747)
  Bottom Layer w6: v1(-650.8,367.8) -639.22,356.22 -433.09,356.22 P5.5 ; v1(259,747) 259,653 265.75,646.25 NEW.2
USDA: NEW.3 P5.6 | length 1318.2
  Signal Layer 1 w6: v1(-648,402) -648,490.03 -474.03,664 41,664 117.38,740.38 v1(226.38,740.38)
  Bottom Layer w6: v1(-648,402) -625,379 P5.6 ; v1(226.38,740.38) 226.38,651.62 246.06,631.94 NEW.3
USTAND_BY: NEW.28 P5.19 | length 686.7
  Bottom Layer w6: P5.19 -301,29 -242,88 -242,480 -246.06,484.06 NEW.28
UTIGGER: P5.22 P6.1 R26.2 RS3.5 S1.5 S1.6 | length 3017.1
  Top Layer w10: v1(-697,-478) -621,-478 -611.41,-487.59 R26.2 -549.2,-580.2 -462.8,-580.2 P6.1 -340,-577 v1(-340,-563) ; S1.6 489,-175 498,-166 v1(498,-134) ; S1.5 489,-125
  Signal Layer 1 w10: v1(-340,-563) -131,-563 -120.24,-552.24 -120.24,-313.24 -94,-287 65,-287 74,-278 74,-163.47 87.47,-150 482,-150 v1(498,-134)
  Bottom Layer w10: v1(-697,-478) -659,-440 -659,-44 -636,-21 P5.22 -496,-21 -471.22,3.78 -320.22,3.78 -309,15 -295.2,15 -228,82.2 -228,272 -219.16,280.84 RS3.5
UTIGGER_IO: NEW.27 RS3.4 | length 254.7
  Bottom Layer w6: NEW.27 -226.38,458 -226.38,414.38 -186.9,374.9 RS3.4
UVSYN: P5.25 RS2.8 | length 830.9
  Bottom Layer w6: P5.25@-376,-121 P5.25 -404.81,-115.5 -232.5,-115.5 -158,-41 -18,-41 ; -32,-41 -18,-41 ; RS2.8 45.55,264.55 29,248 29,-9 -3,-41 -18,-41
UVSYN_IO: NEW.10 RS2.1 | length 264.2
  Bottom Layer w6: RS2.1 45.55,426.49 108.27,489.21 NEW.10
VCC3V3: NEW.29 NEW.30 P5.1 P5.2 | length 498.3
  Bottom Layer w12: NEW.30 -285.43,499.43 -274.5,488.5 ; -265.75,497.25 NEW.29
  Bottom Layer w20: P5.2@-570.5,482.19 P5.2 P5.1 -319,479 ; -318,479 -284,479 -274.5,488.5 -265.75,497.25
VCC(+5V): C3.1 C4.2 C5.2 C6.1 JP1.2 P1.2 R1.1 R2.1 R3.1 R4.1 R5.1 R14.2 R15.1 U1.4 U1.6 U1.18 U2.8 U3.2 | length 4451.7
  Top Layer w20: v3(-722,-73) -665,-73 -630,-38 -437.54,-38 -405.54,-70 R1.1 -398.59,-72 R14.2 ; U2.8 -525.51,-265 -234.41,-265 C4.2 ; R15.1 -411,-462 -380,-493 v3(-380,-528) ; C4.2@-218.59,-278 C4.2 ; v3(-175,-312) -207.59,-279.41 C4.2 ; U1.4 v3(-25.75,-226) ; C3.1 37.24,-363.65 U1.6 37.24,-251 10.24,-224 -25.75,-224 -25.75,-89.75 68.73,4.73 U1.18 ; v3(279,-369) 286,-376 486.97,-376 624,-376 ; v3@280,-369 280,-183.82 R5.1 R4.1 R3.1 R2.1 ; P1.2 JP1.2@409,-550 ; JP1.2 413,-548 588.91,-548 624,-512.91 624,-376 ; U3.2@735,-376 624,-376
  Signal Layer 1 w20: v3(-722,-73) -722,-342 -608,-456 -469,-456 -397,-528 v3(-380,-528) -202,-528 -176,-502 v3@-176,-312
  Bottom Layer w20: v3(-175,-312) -118,-369 -25.75,-369 ; v3(-25.75,-226) -25.75,-369 ; v3(279,-369) -25.75,-369
VCC_9V: P2.8 P3.1 P4.8 U3.3 U4.2 U5.2 U6.2 U7.2 U8.2 U9.2 U10.2 U11.2 U12.2 U13.2 U14.2 U15.2 | length 6919.6
  Top Layer w25: v2(-667,67) -469,67 -444,92 U13.2 ; U15.2 -494.59,483 v2@-417,560.59 ; U14.2 -444,364.91 -413.91,395 v2@-154,395 ; v2(-417,577) -417,646 -401.5,661.5 -328.66,661.5 -307,639.84 U12.2 ; U6.2 -307,235 -289.5,217.5 v2@-147.5,217.5 ; -307,397 U7.2 ; P3.1 77.04,652.87 v2@140,652.87 ; v2@173.24,-656 173.24,-581.36 242.64,-581.36 283,-541 283,-470 301,-452 427,-452 441.55,-466.55 U3.3 580.55,-466.55 v2(581,-467) ; U8.2 309,205 322,218 v2(378,218) 435,218 447,230 U11.2 ; U4.2 309,386 ; U5.2 309,561 318,570 v2(377,570) 433,570 447,584 U9.2 ; 317,394 v2(378,394) 436,394 447,405 U10.2 447,419.09
  Signal Layer 1 w25: v2(-667,67) -553,67 -536.5,83.5 -536.5,157.89 -456.89,237.5 -206.5,237.5 ; v2@-417,578 -367.5,627.5 122.5,627.5 v2(145,650) 297,650 v2(377,570) 427.5,519.5 580.5,519.5 v2(604,496) ; -198,229 v2(-136,229) v2(-136,412) -136,623.5
  Bottom Layer w25: P2.8@-171.24,-581.36 -171.24,-675.76 -125.5,-721.5 113.5,-721.5 v2(174,-661) v2@174,-662.23 ; 328,394 v2(378,394) ; v2(377,570) 340,570 323,553 323,273 v2(378,218) ; v2(581,-467) 692,-467 732,-427 732,426 662,496 v2(604,496)
pads on no net: NEW.13 NEW.15 NEW.18 NEW.20 NEW.31 P2.9 P3.7 P4.9 P5.0 P5.7 P5.8 P5.9 P5.10 P5.12 P5.17 P5.20 P5.21 P5.24 P5.26 P5.28 P5.33 P5.34 P5.38 P5.39 P5.40

## Polygon pours and split planes (outlines as drawn)
GND on Bottom Layer "Keep-Out Layer-No Net 2" (solid, remove dead copper, shelved, pour order 1000): -807.24,-591.3 -807.24,648.07 -639.52,815.79 599.85,815.79 767.56,648.07 767.56,-591.3 599.85,-759.01 -639.52,-759.01
GND on Signal Layer 1 "Keep-Out Layer-No Net 1" (solid, remove dead copper, shelved, pour order 1001): -787.4,-619.69 -787.4,619.69 -619.68,787.4 619.69,787.4 787.4,619.69 787.4,-619.69 619.69,-787.4 -619.68,-787.4
GND on Top Layer "Keep-Out Layer-No Net" (solid, remove dead copper, shelved, pour order 1002): -770.03,-614.36 -770.03,625.01 -602.32,792.73 637.05,792.73 804.77,625.01 804.77,-614.36 637.05,-782.08 -602.32,-782.08
GND on InternalPlane1 (split plane): 626.67,752 591,752 591,591 741,591 741,637.67 767.3,611.36 767.3,-611.36 741,-637.67 741,-588 591,-588 591,-749 629.67,-749 611.36,-767.3 491,-767.3 491,-672 320,-672 320,-767.3 -611.36,-767.3 -629.67,-749 -599,-749 -599,-588 -749,-588 -749,-629.67 -767.3,-611.36 -767.3,611.36 -749,629.67 -749,591 -599,591 -599,752 -626.67,752 -611.36,767.3 611.36,767.3

## Keep-outs
Keep-Out Layer:
  the board outline again, w8

## Other copper
InternalPlane1 (plane layer: these items are gaps in the copper):
  rectangle: 320,-784.4 491,-672
  rectangle: -749,-749 -599,-588
  rectangle: 591,-749 741,-588
  rectangle: 591,591 741,752
  rectangle: -749,591 -599,752

## Silkscreen, mask and mechanical layers (free items; w line width, h text height)
Top Overlay:
  text "L" at 466,677 h60
  text "RST" at -477,617 h60
  text "GND" at -58,444.94 h60 r90
  text "OUT2" at -8.79,444.94 h60 r90
  text "OUT1" at 40.43,444.94 h60 r90
  text "VCC" at 89.64,445 h60 r90
  text "LED" at -70,356 h80
  text "UC-428" at 731,217 h120 r90
  text "Rev.D" at -722,-187 h100
  text "B" at -59,-482 h60 r90
  text "A" at -102,-487 h60 r90
  text "T1" at 82,-495 h60 r90
  text "T0" at 38,-498 h60 r90
  text "GND" at -148,-530 h60 r90
  text "GND" at -9,-530 h60 r90
  text "GND" at 128,-530 h60 r90
  text "VCC" at 178,-530 h60 r90
  text "G" at -514,-747 h60
  text "T" at -414,-747 h60
Bottom Overlay:
  text "GND" at -93.99,-404.99 h60 r90
  text "GND" at 43.01,-404.99 h60 r90
  text "GND" at 187.01,-404.99 h60 r90
  text "VCC" at -148.99,-407.99 h60 r90
  text "T1" at -49.99,-438.99 h60 r90
  text "T0" at -4.99,-438.99 h60 r90
  text "A" at 138.01,-450.99 h60 r90
  text "B" at 93.01,-454.99 h60 r90
Mechanical 1:
  the board outline again, w8
Mechanical 2:
  text "bootload模式" at 446,-449 h60
  text "下载程序模式" at -10,-458 h60
  text "DTR" at 207.5,-516 h60
  text "RST" at 448,-519 h60
  text "VCC" at 207.5,-564.49 h60
  text "VCC" at 448,-569 h60
  text "TXO" at 207.5,-614.01 h60
  text "MOSI" at 448,-620 h60
  text "RXI" at 207.5,-662.26 h60
  text "MISO" at 448,-670 h60
  text "GND" at 207.5,-713 h60
  text "SCK" at 448,-719 h60
  text "GND" at 207.5,-771 h60
  text "GND" at 448,-772 h60

## Text inside footprints (layer, text, board x,y; h text height)
NEW: Bottom Overlay "30" at -305,546 h60 r180; Bottom Overlay "1" at 301,555 h60 r180
S1: Top Overlay "6" at 489,-165 h19.68 r270; Top Overlay "5" at 489,-120 h19.68 r270; Top Overlay "1" at 489,80 h19.68 r270; Top Overlay "2" at 489,30 h19.68 r270; Top Overlay "3" at 489,-20 h19.68 r270; Top Overlay "4" at 489,-65 h19.68 r270; Top Overlay "ON" at 714,180 h60 r270